# EAGLE board DasAltimeter V0.40 (EAGLE 9.5.2)
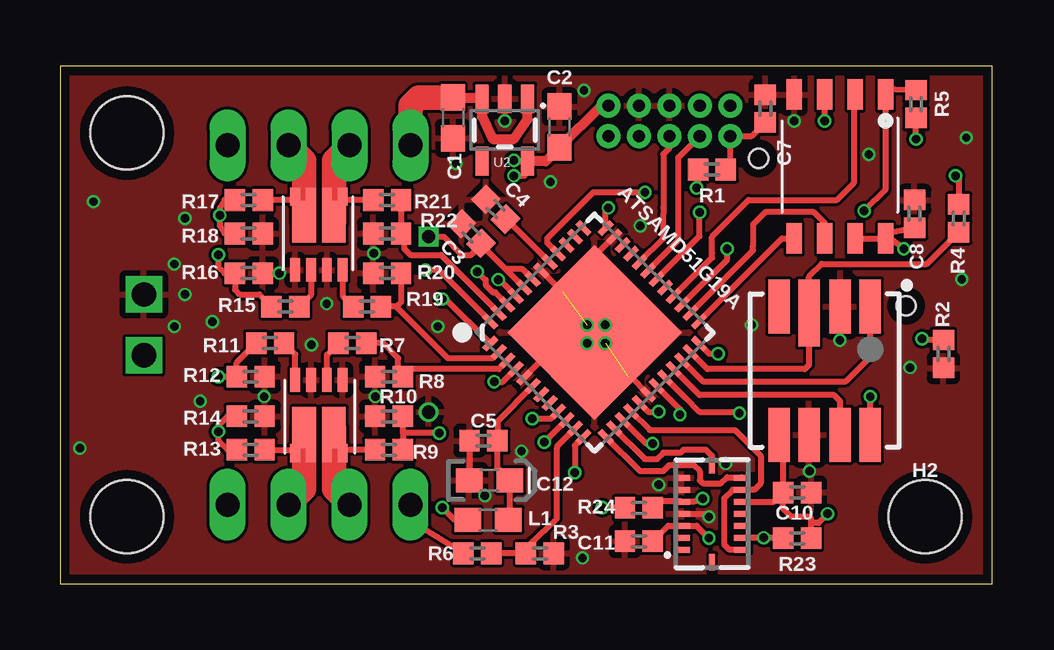
[diagram p0: board, top side]
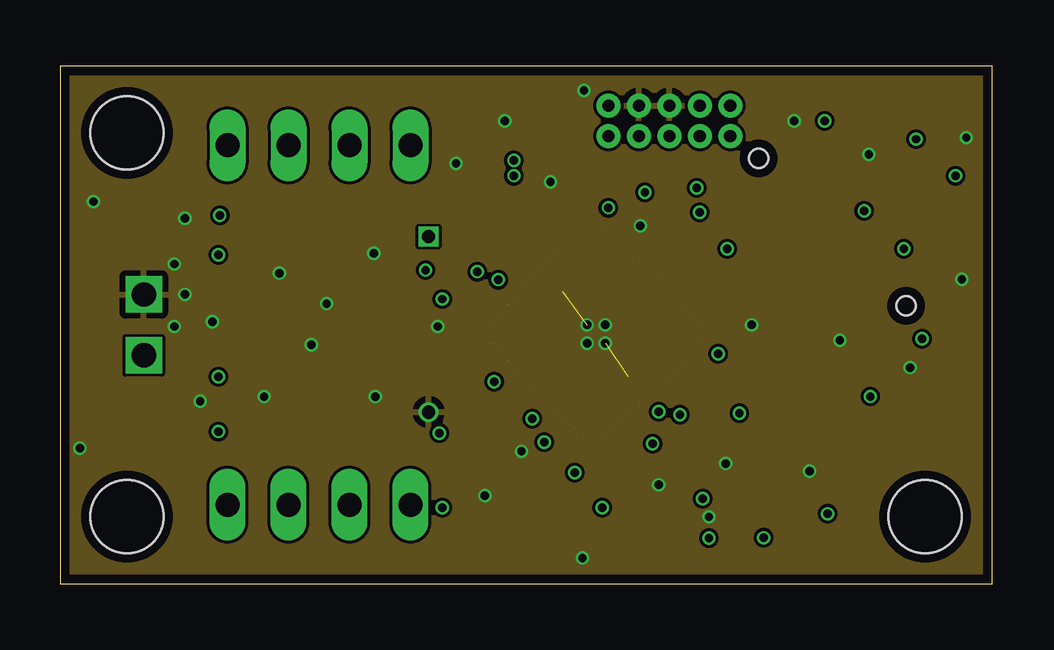
[diagram p1: board, inner layer Route2]
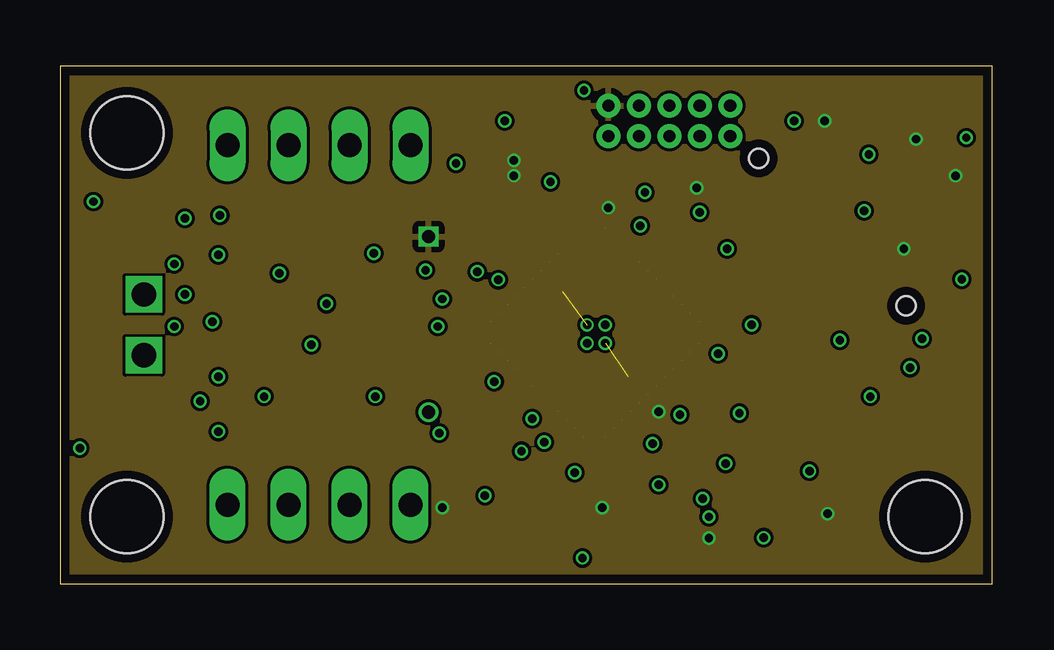
[diagram p2: board, inner layer Route15]
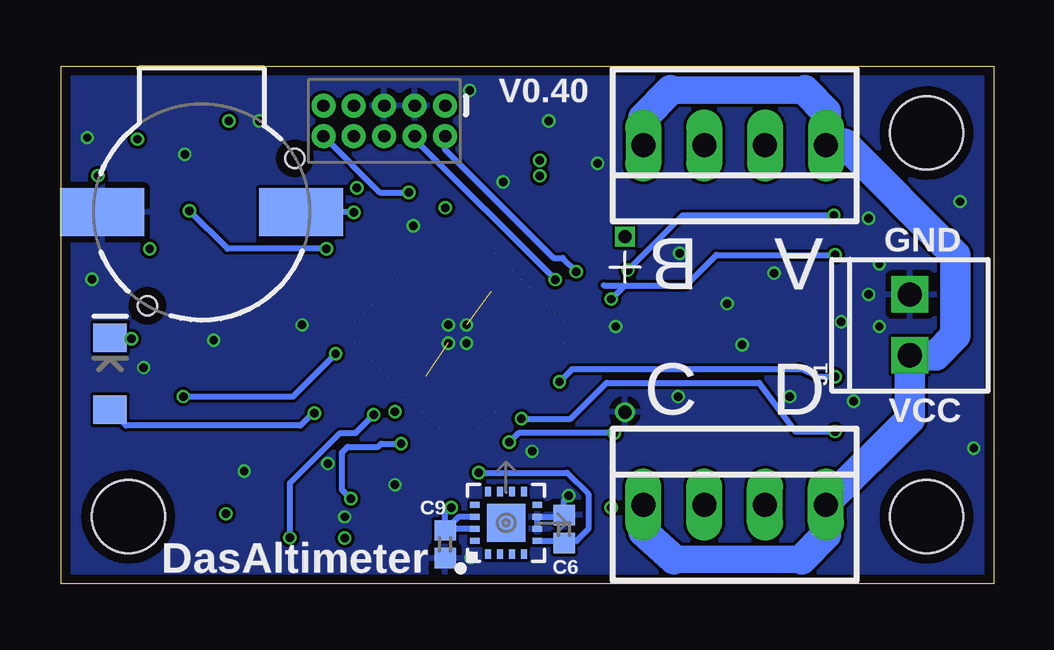
[diagram p3: board, bottom side, seen from below]

Size 38.86 x 21.59 mm. Coordinates in mm from the lower left corner, seen from the top.
Outline: 0,0 38.86,0 38.86,21.59 0,21.59 0,0
Copper layers (1*2*15*16): Top 0.035559375mm / dielectric 0.17018125mm / Route2 0.01778125mm / dielectric 47mil / Route15 0.01778125mm / dielectric 0.17018125mm / Bottom 0.035559375mm
Design rules "oshpark-4layer *": minimum track width 5mil, minimum drill 10mil, track to track 5mil, track to pad 5mil, pad to pad 5mil, via to via 5mil, smd to smd 5mil, copper to edge 15mil, drill to drill 6mil, minimum pad ring 4mil, minimum via ring 4mil, stop-mask expansion 0mil, vias tented up to drill 0mil, thermal gap 10mil

## Footprints (pad centres in the part's own frame; a part is rotated, then mirrored left to right if it is on the bottom)
0603 = smd 1.1 x 1: 1 -0.85,0; 2 0.85,0
0402 = smd 0.85 x 0.9: 1 -0.58,0; 2 0.58,0
0603-POLAR = smd 1.1 x 1: + 0.85,0; - -0.85,0
LED-1206 = smd 1.2 x 1.4: A -1.5,0; C 1.5,0
STAND-OFF-TIGHT = hole 3.048: 0,0
BMI055 = smd 0.675 x 0.25: 1 1.262,1.5; 2 1.262,1; 3 1.262,0.5; 4 1.262,0; 5 1.262,-0.5; 6 1.262,-1; 7 1.262,-1.5; 9 -1.262,-1.5; 10 -1.262,-1; 11 -1.262,-0.5; 12 -1.262,0; 13 -1.262,0.5; 14 -1.262,1; 15 -1.262,1.5 | smd 0.25 x 0.675: 8 0,-2.013; 16 0,2.013
1X02_2.54_SCREWTERM = drill 1.016 square: P1 2.54,0; P2 0,0
2X5-PTH-1.27MM = drill 0.508 pad 1: 1 -2.54,-0.635; 2 -2.54,0.635; 3 -1.27,-0.635; 4 -1.27,0.635; 5 0,-0.635; 6 0,0.635; 7 1.27,-0.635; 8 1.27,0.635; 9 2.54,-0.635; 10 2.54,0.635
BUZZER-CCV-KIT = smd 3.5 x 2: + 4.15,0; - -4.15,0 | hole 0.8: -3.9,-2.25; 2.25,3.9
SOT23-5 = smd 0.55 x 1.2: 1 -0.95,-1.3; 2 0,-1.3; 3 0.95,-1.3; 4 0.95,1.3; 5 -0.95,1.3
MS5803 = smd 2.25 x 0.9: 1 -2.675,1.9; 2 -2.675,0.65; 4 -2.675,-1.9; 5 2.675,-1.9; 6 2.675,-0.65; 7 2.675,0.65; 8 2.675,1.9 | smd 2.8 x 0.9: 3 -2.4,-0.65
LFCSP-16-3X3 = smd 0.4 x 0.25: 1 -1.3,0.75; 2 -1.3,0.25; 3 -1.3,-0.25; 4 -1.3,-0.75; 9 1.3,-0.75; 10 1.3,-0.25; 11 1.3,0.25; 12 1.3,0.75 | smd 0.25 x 0.4: 5 -0.75,-1.3; 6 -0.25,-1.3; 7 0.25,-1.3; 8 0.75,-1.3; 13 0.75,1.3; 14 0.25,1.3; 15 -0.25,1.3; 16 -0.75,1.3 | smd 1.6 x 1.6: EXP 0,0
PB-5R0H104-R = drill 0.55 square: +5V 0,0 | drill 0.55: GND 0,7.32
AT25SF081 = smd 1.27 x 0.635: !CS -3,2.54; !HOLD 3,1.27; !WP -3,0; GND -3,-1.27; SCK 3,0; SI 3,-1.27; SO -3,1.27; VCC 3,2.54
SI7232DN = smd 0.991 x 0.406: 1 -1.13,0.991; 2 -1.13,0.33; 3 -1.13,-0.33; 4 -1.13,-0.991 | smd 0.762 x 0.406: 5 1.918,-0.991; 6 1.918,-0.33; 7 1.918,0.33; 8 1.918,0.991 | smd 1.727 x 0.991: 9 0.864,0.622; 10 0.864,-0.622
QFN-48 = smd 0.7 x 0.25: 1 -3.4,2.75; 2 -3.4,2.25; 3 -3.4,1.75; 4 -3.4,1.25; 5 -3.4,0.75; 6 -3.4,0.25; 7 -3.4,-0.25; 8 -3.4,-0.75; 9 -3.4,-1.25; 10 -3.4,-1.75; 11 -3.4,-2.25; 12 -3.4,-2.75; 25 3.4,-2.75; 26 3.4,-2.25; 27 3.4,-1.75; 28 3.4,-1.25; 29 3.4,-0.75; 30 3.4,-0.25; 31 3.4,0.25; 32 3.4,0.75; 33 3.4,1.25; 34 3.4,1.75; 35 3.4,2.25; 36 3.4,2.75 | smd 0.25 x 0.7: 13 -2.75,-3.4; 14 -2.25,-3.4; 15 -1.75,-3.4; 16 -1.25,-3.4; 17 -0.75,-3.4; 18 -0.25,-3.4; 19 0.25,-3.4; 20 0.75,-3.4; 21 1.25,-3.4; 22 1.75,-3.4; 23 2.25,-3.4; 24 2.75,-3.4; 37 2.75,3.4; 38 2.25,3.4; 39 1.75,3.4; 40 1.25,3.4; 41 0.75,3.4; 42 0.25,3.4; 43 -0.25,3.4; 44 -0.75,3.4; 45 -1.25,3.4; 46 -1.75,3.4; 47 -2.25,3.4; 48 -2.75,3.4 | smd 5.15 x 5.15: EP 0,0
22-23-2041 = drill 1 long: 1 -3.81,0; 2 -1.27,0; 3 1.27,0; 4 3.81,0

## Placement (x,y rotation side)
C1  2.2uF  [0603]  16.38,19.43 270 top
C2  2.2uF  [0603]  20.83,19.05 90 top
C3  0.1uF  [0402]  17.14,14.61 135 top
C4  0.1uF  [0402]  18.16,15.62 135 top
C5  0.1uF  [0402]  17.65,5.97 180 top
C6  0.01uF  [0402]  17.91,2.29 90 bottom
C7  100nF  [0402]  29.4,19.81 90 top
C8  0.1uF  [0402]  35.62,15.43 90 top
C9  0.1uF  [0402]  22.86,1.65 270 bottom
C10  0.1uF  [0402]  30.73,3.81 0 top
C11  0.1uF  [0402]  24.13,1.78 180 top
C12  10uF  [0603-POLAR]  17.91,4.32 0 top
D2  GREEN  [LED-1206]  36.83,8.76 90 bottom
FRAME1  FRAME-LETTERNO_PACKAGE  [DUMMY]  -21.34,51.05 0 top  (outside the outline)
H1  STAND-OFFTIGHT  [STAND-OFF-TIGHT]  2.79,18.8 0 top
H2  STAND-OFFTIGHT  [STAND-OFF-TIGHT]  36.07,2.79 0 top
H3  STAND-OFFTIGHT  [STAND-OFF-TIGHT]  2.79,2.79 0 top
IC1  BMI055  [BMI055]  27.18,2.92 180 top
J1  [1X02_2.54_SCREWTERM]  3.49,9.53 90 bottom
JP1  CORTEX_DEBUG_PTH  [2X5-PTH-1.27MM]  25.4,19.3 180 bottom
L1  FB 30Ohm  [0603]  17.84,2.67 180 top
R1  10k  [0402]  27.18,17.27 180 top
R2  63  [0402]  36.83,9.59 90 top
R3  27k  [0402]  20,1.27 180 top
R4  10k  [0402]  37.46,15.24 90 top
R5  10k  [0402]  35.69,20 270 top
R6  100k  [0402]  17.4,1.27 180 top
R7  100  [0402]  12.19,10.03 0 top
R8  3.3k  [0402]  13.72,8.64 180 top
R9  100k  [0402]  13.72,5.59 0 top
R10  27k  [0402]  13.72,6.98 180 top
R11  100  [0402]  8.76,10.03 0 top
R12  3.3k  [0402]  7.95,8.64 180 top
R13  100k  [0402]  7.95,5.59 0 top
R14  27k  [0402]  7.95,6.98 180 top
R15  100  [0402]  9.4,11.56 180 top
R16  3.3k  [0402]  7.87,12.95 0 top
R17  100k  [0402]  7.87,16 180 top
R18  27k  [0402]  7.87,14.61 0 top
R19  100  [0402]  12.8,11.56 180 top
R20  3.3k  [0402]  13.64,12.95 0 top
R21  100k  [0402]  13.64,16 180 top
R22  27k  [0402]  13.64,14.61 0 top
R23  10k  [0402]  30.73,1.91 180 top
R24  10k  [0402]  24.13,3.17 0 top
SG1  BUZZER-SMD_KIT  [BUZZER-CCV-KIT]  33.02,15.49 180 bottom
U2  3.3V/150mA  [SOT23-5]  18.54,18.92 180 top
U3  MS5803-14BA  [MS5803]  31.88,8.89 270 top
U5  ADXL377  [LFCSP-16-3X3]  20.32,2.54 90 bottom
U$1  PB-5R0H104-R  [PB-5R0H104-R]  15.37,14.48 180 bottom
U$2  AT25SF081  [AT25SF081]  31.88,17.4 270 top
U$3  SI7232DN  [SI7232DN]  10.79,7.37 270 top
U$4  SI7232DN  [SI7232DN]  10.79,14.22 90 top
U$5  ATSAMD51G19A  [QFN-48]  22.29,10.48 45 top
X1  22-23-2041  [22-23-2041]  10.79,3.3 0 bottom
X2  22-23-2041  [22-23-2041]  10.79,18.29 180 bottom

## Library data of the parts
C1 C2 = SparkFun-Capacitors; PROD_ID: CAP-07888
C3-C11 = SparkFun-Capacitors; PROD_ID: CAP-12416
C12 = SparkFun-Capacitors; PROD_ID: CAP-13210
D2 = SparkFun-LED; PROD_ID: DIO-00862
FRAME1 = SparkFun-Aesthetics; DESIGNER: Nobody; VERSION: v01
H1-H3 = SparkFun-Hardware
IC1 = BMI055; DESCRIPTION: IMUs - Inertial Measurement Units 6-Axis Inertia 3x4.5mm LGA-16; HEIGHT: mm; MANUFACTURER_NAME: Bosch Sensortec; MANUFACTURER_PART_NUMBER: BMI055; SUPPLIER_NAME: RS
J1 JP1 = SparkFun-Connectors
L1 = SparkFun-Coils; PROD_ID: NDUC-07874
R1-R24 = SparkFun-Resistors
SG1 = SparkFun-Electromechanical; PROD_ID: COMP-08568
U2 = SparkFun-IC-Power; PROD_ID: VREG-00822
U3 = SparkFun-Sensors; PROD_ID: IC-12111
U5 = SparkFun-Sensors; PROD_ID: IC-12027
U$1-U$4 = SaL-lib1
U$5 = SparkFun-IC-Microcontroller
X1 X2 = con-molex; MF: MOLEX; MPN: 22-23-2041; OC_FARNELL: 1462920; OC_NEWARK: 38C0355

## Nets
3.3V: C2.1 C3.1 C8.1 C9.1 C10.1 C11.1 IC1.3 IC1.11 JP1.1 L1.2 R1.2 R4.2 R5.2 R23.1 R24.1 U2.5 U3.5 U5.14 U5.15 U$1.+5V U$2.!HOLD U$2.!WP U$2.VCC U$5.17 U$5.36 U$5.43 U$5.44
!RESET: C7.1 JP1.10 R1.1 U$5.40
ACCELX: C6.1 U5.5 U$5.12
BUZZER: SG1.- U$5.30
CS_ACCEL: IC1.14 R23.2 U$5.19
CS_BARO: R4.1 U3.3 U$5.23
CS_GYRO: IC1.5 R24.2 U$5.15
CS_MEM: R5.1 U$2.!CS U$5.27
FET_A: R17.1 U$4.7 U$4.8 U$4.9 X2.2
FET_B: R21.2 U$4.5 U$4.6 U$4.10 X2.3
FET_C: R9.1 U$3.7 U$3.8 U$3.9 X1.2
FET_D: R13.2 U$3.5 U$3.6 U$3.10 X1.3
FIRE_A: R15.2 R16.1 U$5.1
FIRE_B: R19.1 R20.2 U$5.2
FIRE_C: R7.2 R8.1 U$5.3
FIRE_D: R11.1 R12.2 U$5.4
GND: C1.2 C2.2 C3.2 C4.2 C5.2 C6.2 C7.2 C8.2 C9.2 C10.2 C11.2 C12.- IC1.4 IC1.6 IC1.7 J1.P1 JP1.3 JP1.5 R2.1 R3.1 R8.2 R10.2 R12.1 R14.1 R16.2 R18.2 R20.1 R22.1 SG1.+ U2.2 U3.2 U3.6 U5.6 U5.7 U$1.GND U$2.GND U$3.1 U$3.3 U$4.1 U$4.3 U$5.5 U$5.18 U$5.35 U$5.42 U$5.EP
LED: D2.A U$5.20
N$1: R7.1 U$3.2
N$2: U5.4
N$3: C4.1 U$5.41
N$4: C5.1 C12.+ L1.1 U$5.6
N$8: R11.2 U$3.4
N$12: R15.1 U$4.2
N$13: R19.2 U$4.4
N$29: D2.C R2.2
RX: JP1.6 U$5.32
SENSE_A: R17.2 R18.1 U$5.48
SENSE_B: R21.1 R22.2 U$5.47
SENSE_BAT: R3.2 R6.1 U$5.11
SENSE_C: R9.2 R10.1 U$5.10
SENSE_D: R13.1 R14.2 U$5.9
SPI0_MISO: IC1.10 IC1.15 U$5.16
SPI0_MOSI: IC1.9 U$5.13
SPI0_SCK: IC1.8 U$5.14
SPI1_MISO: U$2.SO U$5.28
SPI1_MOSI: U$2.SI U$5.25
SPI1_SCK: U$2.SCK U$5.26
SPI2_MISO: U3.8 U$5.24
SPI2_MOSI: U3.7 U$5.21
SPI2_SCK: U3.1 U$5.22
SWCLK: JP1.4 U$5.45
SWDIO: JP1.2 U$5.46
TX: JP1.8 U$5.31
VCC: C1.1 J1.P2 R6.2 U2.1 U2.3 X1.1 X1.4 X2.1 X2.4

## Tracks (layer width: path | path; a pad name or v marks a point on that pad's centre or on a via)
3.3V  (via drill 0.35)  (4 unrouted)
  Top 0.254: U$2.VCC 34.68,14.66 C8.1 | U$2.!HOLD U$2.VCC | C11.1 25.35,2.42 IC1.3 26.54,2.42 v27.05,1.91 | IC1.11 29.77,3.42 30.13,3.78 | 30.13,3.78 C10.1 30.15,6.04 U3.5 | R23.1 31.31,2.54 | 31.31,2.54 31.31,2.72 31.24,2.79 30.48,2.79 30.13,3.15 30.13,3.78 | 17.55,14.13 C3.1 | U$1.+5V 16,14.48 16.76,13.72 17.14,13.72 17.55,14.13 | v32,2.92 31.62,2.54 31.31,2.54 | v35.69,18.54 R5.2 | v31.88,19.3 U$2.!WP | v18.92,17.65 18.95,17.62 U2.5 19.56,17.56 19.56,17.14 19.48,17.14 19.35,17.02 v18.92,17.02 | R1.2 26.6,16.57 v26.54,16.51 | v37.34,17.02 37.46,16.89 R4.2 | v35.18,13.97 34.62,14.4 U$2.VCC | R24.1 v22.61,3.17 | L1.2 16.45,2.67 v15.94,3.17 | U$5.44 18.58,13.12 | 18.58,13.12 17.58,14.13 17.55,14.13 | U$5.17 24.53,7.18 v24.96,7.18 | U$5.36 22.75,15.57 v22.86,15.68 | U$5.43 19.29,13.12 18.58,13.12
  Top 0.406: JP1.1 22.57,19.94 C2.1 20.25,17.62 U2.5
  Bottom 0.254: U5.15 22.8,2.29 | 22.8,2.29 C9.1 22.86,2.92 v22.61,3.17 | U5.14 22.3,2.79 22.8,2.29
  pour Route15: 0,-1.27 0,21.59 38.86,21.46 38.86,-1.4
!RESET  (via drill 0.35)  (1 unrouted)
  Top 0.254: R1.1 27.94,17.45 JP1.10 28.84,18.67 C7.1 | v24.38,16.32 22.23,16.32 20.32,14.41 20.32,14.21 U$5.40
  Bottom 0.254: JP1.10 25.59,16.32 v24.38,16.32
ACCELX  (via drill 0.35)  (1 unrouted)
  Top 0.254: U$5.12 21.46,5.76 v21.46,4.63
  Bottom 0.254: U5.5 17.63,1.79 | 17.63,1.79 C6.1 | v21.46,4.63 17.78,4.63 16.89,3.75 16.89,2.29 17.39,1.79 17.63,1.79
BUZZER  (via drill 0.35)  (1 unrouted)
  Top 0.254: U$5.30 26.66,14.49 26.66,15.48 v26.67,15.49
  Bottom 0.254: v26.67,15.49 SG1.-
CS_ACCEL  (via drill 0.35)  (1 unrouted)
  Top 0.254: R23.2 30.17,1.92 v29.34,1.92 IC1.14 | U$5.19 25.84,7.28 v25.84,7.05
  Bottom 0.254: v29.34,1.92 29.34,4.19 27.24,6.29 26.61,6.29 v25.84,7.05
CS_BARO  (1 unrouted)
  Top 0.254: 31.23,10.4 U3.3 | U3.3 31.23,12.81 31.75,13.34 36.14,13.34 R4.1 | U3.3 31.23,9.13 31.05,8.95 26.99,8.95 U$5.23
CS_GYRO  (via drill 0.35)  (1 unrouted)
  Top 0.254: v26.8,3.56 26.42,3.42 IC1.5 25.09,3.43 R24.2 | U$5.15 24.45,5.84 v24.7,5.84
  Bottom 0.254: v26.8,3.56 27.18,3.94 27.18,5.46 26.92,5.71 25.65,5.71 25.53,5.84 v24.7,5.84
CS_MEM  (via drill 0.35)  (1 unrouted)
  Top 0.254: R5.1 34.41,20.65 U$2.!CS 34.42,16.45 v33.53,15.56 | v27.81,13.97 27.81,13.72 27.81,13.53 U$5.27
  Bottom 0.254: v27.81,13.97 31.94,13.97 v33.53,15.56
FET_A
  Top 0.254: R17.1 9.67,16 U$4.8 10.17,16.51 10.17,16.43 U$4.7
  Top 1.016: X2.2 10.17,17.64 10.17,16.51 U$4.9
FET_B
  Top 0.254: R21.2 11.93,16 U$4.5 11.42,16.51 11.12,16.22 U$4.6
  Top 1.016: U$4.10 11.42,16.51 11.42,17.64 X2.3
FET_C
  Top 0.254: R9.1 11.93,5.59 U$3.8 11.43,5.45 | U$3.7 11.43,5.45 | U$3.9 11.42,5.46 11.43,5.45
  Top 1.016: U$3.9 11.42,3.95 X1.2
FET_D
  Top 0.254: R13.2 9.67,5.59 U$3.5 | U$3.5 U$3.6 | U$3.5 9.8,6.13 U$3.10
  Top 1.016: U$3.10 10.17,3.95 X1.3
FIRE_A  (via drill 0.35)  (1 unrouted)
  Top 0.254: R15.2 8.31,12.07 7.49,12.07 7.29,12.26 R16.1 6.86,12.95 6.6,13.21 v6.6,13.72 | U$5.1 16.08,11.88 v15.94,11.88
  Bottom 0.254: v6.6,13.72 11.56,13.72 12.83,12.45 15.37,12.45 | 16.26,12.45 15.37,12.45 | v15.94,11.88 15.37,12.45
FIRE_B  (1 unrouted)
  Top 0.254: 14.02,11.56 R19.1 | U$5.2 18.03,9.4 16.18,9.4 14.02,11.56 | 14.02,11.56 14.22,11.76 R20.2
FIRE_C  (1 unrouted)
  Top 0.254: R8.1 14.1,8.84 14.1,8.95 | 14.1,8.95 14.1,9.4 13.46,10.03 R7.2 | U$5.3 18.29,8.95 14.1,8.95
FIRE_D  (via drill 0.35)  (1 unrouted)
  Top 0.254: R11.1 7.37,9.22 R12.2 v6.6,8.64 | v18.1,8.42 18.46,8.42 18.99,8.96 U$5.4
  Bottom 0.254: 8.13,9.02 7.98,8.94 | 7.98,8.94 R12.2 v6.6,8.64 | 7.98,8.94 17.58,8.94 v18.1,8.42
GND  (via drill 0.35)  (4 unrouted)
  Top 0.254: IC1.4 27.05,2.92 v27.05,2.79 | 17.07,6.2 C5.2 17.07,4.33 C12.- 17.14,4.32 v17.72,3.68 | U$5.18 23.78,8.64 23.69,8.64 | U$5.42 20.93,12.19 20.96,12.19 | U$5.EP 22.1,10.67 | 22.1,10.67 v21.97,10.79 21.84,10.92 21.84,13.21 U$5.35 | U$5.5 21.42,10.67 22.1,10.67
  Bottom 0.254: U5.6 U5.7 18.24,2.79 C6.2 17.91,3.49 v17.72,3.68
  other vias: 10.48,9.97 11.11,11.68 31.24,4.7 32.51,10.16 8.51,7.81 13.14,7.81 9.14,12.95 13.08,13.78 21.78,1.08 22.73,10.79 22.73,10.03 21.97,10.03 16.51,17.53 18.54,19.3 21.84,20.57 37.78,18.61 37.59,12.7 28.83,10.79 19.24,5.52 0.83,5.65 1.4,15.94 4.76,13.34 5.21,12.07 4.76,10.73 6.35,10.92 5.21,15.24 5.84,7.62 33.72,17.91 30.61,19.3 20.45,16.76 24.19,14.92 35.43,9.02 15.75,10.73 27.75,5.02 24.96,4.13
  pour Top: 0,-1.27 0,21.59 38.86,21.59 38.86,-1.27
  pour Route2: 0,-1.27 0,21.59 38.86,21.59 38.86,-1.27
  pour Bottom: 0,-1.27 0,21.59 38.86,21.59 38.86,-1.27
LED  (via drill 0.35)  (1 unrouted)
  Top 0.254: U$5.20 26.06,7.77 26.66,7.18 28.26,7.18 v28.32,7.11
  Bottom 0.254: v28.32,7.11 28.38,7.11 28.89,6.6 36.17,6.6 D2.A
N$1
  Top 0.254: U$3.2 11.12,9.55 R7.1
N$3  (1 unrouted)
  Top 0.254: 18.54,15.18 C4.1 18.62,15.21 U$5.41
N$4  (1 unrouted)
  Top 0.254: U$5.6 18.23,6.78 C5.1 18.23,4.84 C12.+ 18.76,2.73 L1.1
N$8
  Top 0.254: U$3.4 9.8,9.57 R11.2
N$12
  Top 0.254: U$4.2 10.46,12.04 R15.1
N$13
  Top 0.254: U$4.4 11.79,11.99 R19.2
N$29  (via drill 0.35)
  Top 0.254: 37.08,9.97 R2.2 36,10.17 v35.94,10.22
  Bottom 0.254: v35.94,10.22 36.79,10.22 D2.C
RX  (1 unrouted)
  Top 0.254: JP1.6 25.4,18.16 25.15,17.91 25.15,15.68 25.15,15.41 25.15,14.4 U$5.32
SENSE_A  (via drill 0.35)  (1 unrouted)
  Top 0.254: R17.2 6.86,16 6.66,15.68 v6.66,15.37 6.66,14.93 6.86,14.61 R18.1 | U$5.48 15.8,13.08 v15.24,13.08
  Bottom 0.254: v15.24,13.08 12.95,15.37 v6.66,15.37
SENSE_B  (1 unrouted)
  Top 0.254: R21.1 R22.2 14.35,14.47 14.35,13.97 14.61,13.72 15.88,13.72 U$5.47
SENSE_BAT  (1 unrouted)
  Top 0.254: R3.2 19.18,1.27 | 19.18,1.27 R6.1 | 19.18,1.27 20.7,2.71 20.7,5.66 20.72,5.69 20.72,5.73 U$5.11
SENSE_C  (via drill 0.35)  (1 unrouted)
  Top 0.254: 14.3,6.29 R10.1 | 14.3,6.29 R9.2 | v20.19,5.91 U$5.10 | v15.81,6.29 14.3,6.29
  Bottom 0.254: v15.81,6.29 19.81,6.29 v20.19,5.91
SENSE_D  (via drill 0.35)  (1 unrouted)
  Top 0.254: R14.2 6.98,6.98 6.61,6.61 v6.61,6.35 6.6,5.97 6.98,5.59 R13.1 | U$5.9 20.46,6.88 v19.68,6.88
  Bottom 0.254: v6.61,6.35 8.26,6.35 9.78,8.38 16.13,8.38 17.63,6.88 v19.68,6.88
SPI0_MISO  (1 unrouted)
  Top 0.254: IC1.15 27.92,1.42 27.69,1.65 27.69,3.56 28.05,3.92 IC1.10 28.94,3.92 29.21,4.19 29.21,5.33 28.13,6.41 24.59,6.41 U$5.16
SPI0_MOSI  (1 unrouted)
  Top 0.254: IC1.9 28.42,4.45 27.81,4.45 27.56,4.19 26.8,4.19 26.67,4.32 26.67,4.7 26.42,4.95 25.4,4.95 25.15,4.7 24.18,4.7 | 24.18,4.7 | U$5.13 24.18,4.7
SPI0_SCK  (1 unrouted)
  Top 0.254: 24.38,5.21 24.89,5.21 25.15,5.46 25.86,5.46 25.99,5.59 26.92,5.59 27.18,5.33 IC1.8 | U$5.14 24.38,5.21 | 24.38,5.21
SPI1_MISO  (1 unrouted)
  Top 0.254: U$2.SO 33.08,20.46 33.08,16.7 32.38,16 28.7,16 27.18,14.48 27.18,13.78 27.18,13.6 U$5.28
SPI1_MOSI  (1 unrouted)
  Top 0.254: 30.29,14.41 U$2.SI 30.1,14.4 U$5.25
SPI1_SCK  (1 unrouted)
  Top 0.254: U$2.SCK 31.88,15.05 31.43,15.49 29.4,15.49 28.89,14.99 28.89,14.1 28.89,13.9 U$5.26
SPI2_MISO  (via drill 0.35)  (1 unrouted)
  Top 0.254: U3.8 v33.78,7.8 v33.78,7.81 | v27.43,9.59 27.07,9.59 U$5.24
  Bottom 0.254: v33.78,7.81 29.21,7.81 v27.43,9.59
SPI2_MOSI  (1 unrouted)
  Top 0.254: U3.7 32.53,7.61 32.26,7.87 26.66,7.87 U$5.21
SPI2_SCK  (1 unrouted)
  Top 0.254: U$5.22 26.8,8.45 32.77,8.45 33.78,9.46 U3.1
SWCLK  (via drill 0.35)  (1 unrouted)
  Top 0.254: v18.27,12.68 18.32,12.68 U$5.45
  Bottom 0.254: JP1.4 24.13,18.54 v18.27,12.68
SWDIO  (via drill 0.35)  (1 unrouted)
  Top 0.254: v17.4,13.02 17.74,12.68 17.74,12.46 18.05,12.15 18.14,12.15 U$5.46
  Bottom 0.254: v17.4,13.02 17.97,13.59 18.35,13.59 22.86,18.1 JP1.2
TX  (1 unrouted)
  Top 0.254: JP1.8 25.78,17.78 25.78,14.32 U$5.31
VCC
  Top 0.254: R6.2 14.73,2.54 14.61,2.67 X1.1
  Top 0.406: C1.1 17.53,20.28 U2.3 17.59,19.49 18.03,18.54 18.92,18.54 19.49,19.37 U2.1
  Top 1.016: X2.4 14.61,19.94 14.95,20.28 C1.1
  Bottom 1.143: 7.87,20.57 13.46,20.57 | 8,1.02 13.34,1.02
  Bottom 1.27: 7.87,20.57 6.98,19.68 X2.1 6.29,18.29 6.22,18.35 1.59,13.72 1.59,10.35 2.41,9.53 J1.P2 3.49,6.86 6.98,3.37 X1.4 6.98,2.03 8,1.02 | X2.4 14.61,19.43 13.46,20.57 | 13.34,1.02 14.61,2.16 X1.1

## Text on the board
bNames: V0.40 | GND | A | B | D | C | VCC | DasAltimeter